# Altium PCB PCB_V1.PcbDoc
Units mm, origin at the board's own origin, x right, y up, seen from the top; angles counter-clockwise.
Board outline 275.45 x 22 mm, 2 copper layers (Top Layer, Bottom Layer), stack 0.08 mm thick; 7 components, 4 nets, 16 pads, 3 vias.
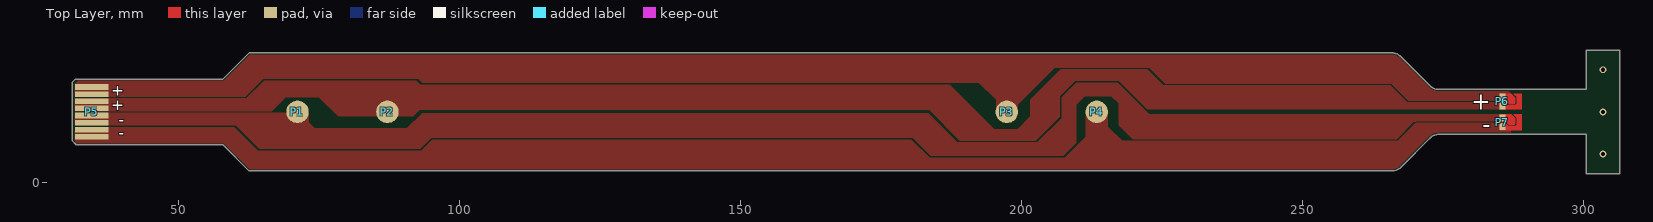
[diagram p0: Top Layer view]
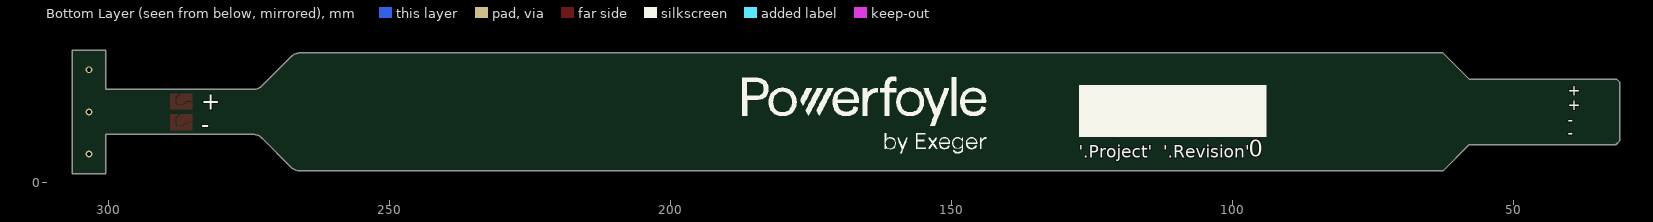
[diagram p1: Bottom Layer view, seen from below]

## Layer stack, top to bottom
Top Solder: solder mask 0.0102, Solder Resist, Dk 3.5
Top Layer: signal copper 0.035
Dielectric 1: dielectric 0.01, Kapton, Dk 4.8
Bottom Layer: signal copper 0.035
Bottom Solder: solder mask 0.0102, Solder Resist, Dk 3.5

## Board outline
31.75,6.65 57.85,6.65 62.5,2 265.894,2 ccw(c265.9,4.232) 267.569,2.75 272.569,7.75 cw(c274.238,6.268) 274.244,8.5 300.45,8.5 300.45,1.5 306.45,1.5 306.45,23.5 300.45,23.5 300.45,16.5 274.219,16.5 cw(c274.213,18.732) 272.544,17.25 267.544,22.25 ccw(c265.875,20.768) 265.869,23 62.5,23 57.85,18.35 31.6,18.35 31,17.75 31,7.4

## Design rules (kind name [scope] priority, off if disabled: settings)
BoardOutlineClearance [All] p1: gap=0.3 ignorepadtopadclearanceinfootprint=FALSE
Clearance "Clearance to cell connections" [HasFootprint('Cell_pad_6mm')] p1: gap=0.6 ignorepadtopadclearanceinfootprint=FALSE
Clearance [All] p2: gap=0.2 ignorepadtopadclearanceinfootprint=FALSE
DiffPairsRouting [All] p1: maxlimit=0.254 minlimit=0.254 mostfreqgap=0.254 substack1={AC398A8C-2EBD-4929-A576-1C4F7B57599D} toplayer_{ac398a8c-2ebd-4929-a576-1c4f7b57599d}_minwidth=0.381 toplayer_{ac398a8c-2ebd-4929-a576-1c4f7b57599d}_maxwidth=0.381 toplayer_{ac398a8c-2ebd-4929-a576-1c4f7b57599d}_prefwidth=0.381 bottomlayer_{ac398a8c-2ebd-4929-a576-1c4f7b57599d}_minwidth=0.381 bottomlayer_{ac398a8c-2ebd-4929-a576-1c4f7b57599d}_maxwidth=0.381 bottomlayer_{ac398a8c-2ebd-4929-a576-1c4f7b57599d}_prefwidth=0.381 substack2={C3FBE846-BD83-49AA-845B-1BEE8A776ADA} toplayer_{c3fbe846-bd83-49aa-845b-1bee8a776ada}_minwidth=0.381 toplayer_{c3fbe846-bd83-49aa-845b-1bee8a776ada}_maxwidth=0.381 toplayer_{c3fbe846-bd83-49aa-845b-1bee8a776ada}_prefwidth=0.381 bottomlayer_{c3fbe846-bd83-49aa-845b-1bee8a776ada}_minwidth=0.381 bottomlayer_{c3fbe846-bd83-49aa-845b-1bee8a776ada}_maxwidth=0.381 bottomlayer_{c3fbe846-bd83-49aa-845b-1bee8a776ada}_prefwidth=0.381 substack3={068A34C2-B61F-40AE-8550-B44704E20CBD} toplayer_{068a34c2-b61f-40ae-8550-b44704e20cbd}_minwidth=0.381 toplayer_{068a34c2-b61f-40ae-8550-b44704e20cbd}_maxwidth=0.381 toplayer_{068a34c2-b61f-40ae-8550-b44704e20cbd}_prefwidth=0.381 bottomlayer_{068a34c2-b61f-40ae-8550-b44704e20cbd}_minwidth=0.381 bottomlayer_{068a34c2-b61f-40ae-8550-b44704e20cbd}_maxwidth=0.381 bottomlayer_{068a34c2-b61f-40ae-8550-b44704e20cbd}_prefwidth=0.381 toplayer_minwidth=0.381 toplayer_maxwidth=0.381 toplayer_prefwidth=0.381 bottomlayer_minwidth=0.381 bottomlayer_maxwidth=0.381 bottomlayer_prefwidth=0.381 substack4={1DBF04A3-A739-4845-80F4-67AE6DF34821} toplayer_{1dbf04a3-a739-4845-80f4-67ae6df34821}_minwidth=0.381 toplayer_{1dbf04a3-a739-4845-80f4-67ae6df34821}_maxwidth=0.381 toplayer_{1dbf04a3-a739-4845-80f4-67ae6df34821}_prefwidth=0.381 bottomlayer_{1dbf04a3-a739-4845-80f4-67ae6df34821}_minwidth=0.381 bottomlayer_{1dbf04a3-a739-4845-80f4-67ae6df34821}_maxwidth=0.381 bottomlayer_{1dbf04a3-a739-4845-80f4-67ae6df34821}_prefwidth=0.381 substack5={706D0DFD-092C-4A59-9570-597311E816E1} toplayer_{706d0dfd-092c-4a59-9570-597311e816e1}_minwidth=0.381 toplayer_{706d0dfd-092c-4a59-9570-597311e816e1}_maxwidth=0.381 toplayer_{706d0dfd-092c-4a59-9570-597311e816e1}_prefwidth=0.381 bottomlayer_{706d0dfd-092c-4a59-9570-597311e816e1}_minwidth=0.381 bottomlayer_{706d0dfd-092c-4a59-9570-597311e816e1}_maxwidth=0.381 bottomlayer_{706d0dfd-092c-4a59-9570-597311e816e1}_prefwidth=0.381 substack6={F6441547-04AD-42D8-8F2E-114EB13474D3} toplayer_{f6441547-04ad-42d8-8f2e-114eb13474d3}_minwidth=0.381 toplayer_{f6441547-04ad-42d8-8f2e-114eb13474d3}_maxwidth=0.381 toplayer_{f6441547-04ad-42d8-8f2e-114eb13474d3}_prefwidth=0.381 bottomlayer_{f6441547-04ad-42d8-8f2e-114eb13474d3}_minwidth=0.381 bottomlayer_{f6441547-04ad-42d8-8f2e-114eb13474d3}_maxwidth=0.381 bottomlayer_{f6441547-04ad-42d8-8f2e-114eb13474d3}_prefwidth=0.381 substack7={D3D7B19F-2A18-4F5B-8A84-D7E783B0B577} toplayer_{d3d7b19f-2a18-4f5b-8a84-d7e783b0b577}_minwidth=0.381 toplayer_{d3d7b19f-2a18-4f5b-8a84-d7e783b0b577}_maxwidth=0.381 toplayer_{d3d7b19f-2a18-4f5b-8a84-d7e783b0b577}_prefwidth=0.381 bottomlayer_{d3d7b19f-2a18-4f5b-8a84-d7e783b0b577}_minwidth=0.381 bottomlayer_{d3d7b19f-2a18-4f5b-8a84-d7e783b0b577}_maxwidth=0.381 bottomlayer_{d3d7b19f-2a18-4f5b-8a84-d7e783b0b577}_prefwidth=0.381 substack8={33F0C8AE-5BAA-4F54-8420-C15B5188DF2B} toplayer_{33f0c8ae-5baa-4f54-8420-c15b5188df2b}_minwidth=0.381 toplayer_{33f0c8ae-5baa-4f54-8420-c15b5188df2b}_maxwidth=0.381 toplayer_{33f0c8ae-5baa-4f54-8420-c15b5188df2b}_prefwidth=0.381 bottomlayer_{33f0c8ae-5baa-4f54-8420-c15b5188df2b}_minwidth=0.381 bottomlayer_{33f0c8ae-5baa-4f54-8420-c15b5188df2b}_maxwidth=0.381 bottomlayer_{33f0c8ae-5baa-4f54-8420-c15b5188df2b}_prefwidth=0.381 substack9={5DEA7FFC-9C65-4E3C-AA6C-196D072506BA} toplayer_{5dea7ffc-9c65-4e3c-aa6c-196d072506ba}_minwidth=0.381 toplayer_{5dea7ffc-9c65-4e3c-aa6c-196d072506ba}_maxwidth=0.381 toplayer_{5dea7ffc-9c65-4e3c-aa6c-196d072506ba}_prefwidth=0.381 bottomlayer_{5dea7ffc-9c65-4e3c-aa6c-196d072506ba}_minwidth=0.381 bottomlayer_{5dea7ffc-9c65-4e3c-aa6c-196d072506ba}_maxwidth=0.381 bottomlayer_{5dea7ffc-9c65-4e3c-aa6c-196d072506ba}_prefwidth=0.381 maxuncoupledlength=12.7
PolygonConnect [All] p1: connectstyle=Direct reliefconductorwidth=0.254 reliefentries=4 polygonreliefangle="90 Angle" airgapwidth=0.254
RoutingVias [All] p1: holewidth=0.711 width=1.27 viastyle="Through Hole" minholewidth=0.711 minwidth=1.27 maxholewidth=0.711 maxwidth=1.27
SolderMaskExpansion [All] p1: expansion=0.102 istentingtop=FALSE
UnRoutedNet [All] p1: checkbadconnections=TRUE
Width [All] p1: maxlimit=10 minlimit=0.2 preferedwidth=2 substack1={AC398A8C-2EBD-4929-A576-1C4F7B57599D} substack2={C3FBE846-BD83-49AA-845B-1BEE8A776ADA} substack3={068A34C2-B61F-40AE-8550-B44704E20CBD} substack4={1DBF04A3-A739-4845-80F4-67AE6DF34821} substack5={706D0DFD-092C-4A59-9570-597311E816E1} substack6={F6441547-04AD-42D8-8F2E-114EB13474D3} substack7={D3D7B19F-2A18-4F5B-8A84-D7E783B0B577} substack8={33F0C8AE-5BAA-4F54-8420-C15B5188DF2B} substack9={5DEA7FFC-9C65-4E3C-AA6C-196D072506BA}
28 further rules are at their usual default settings.

## Components (designator, comment, footprint, x,y, rotation, side; value= is the part's Value field where it differs from the comment)
P1 "Cell connection" Cell_Pad_4mm 71.116,12.5 r0 top
P2 "Cell connection" Cell_Pad_4mm 87.116,12.5 r0 top
P3 "Cell connection" Cell_Pad_4mm 197.347,12.5 r0 top
P4 "Cell connection" Cell_Pad_4mm 213.347,12.5 r0 top
P5 "Exeger IV-test" EXEGER_IV_8_PIN_NO_STIFF 34.5,16.935 r0 top
P6 "Customer conn, solder short" Customer_2022_solder_short 287.05,14.35 r0 top
P7 "Customer conn, solder short" Customer_2022_solder_short 287.05,10.65 r0 top

## Footprints (in the part's own frame and the unit in brackets; to place one, negate y for a bottom-side part, rotate by r counter-clockwise, add the part's x,y. Pads: shape width x height; smd on the part's side, far side on the other; paste and mask are expansions set on the pad)
Cell_Pad_4mm [mm]
  round 4 smd mask+0: 1(0,0)
Customer_2022_solder_short [mm]
  rect 1x1.3 smd paste-2 mask+0: 1(-1.5,0.75) 2(-1.5,-0.75)
  Top Layer region: -2,1.4 0.1,1.4 0.8,0.7 0.8,-0.3 0.6,-0.5 -0.3,-0.5 -0.9,0.1 -2,0.1
  Top Layer region: -2,-1.4 1.9,-1.4 1.9,1.4 0.5,1.4 0.5,1.3 1,0.8 1,-0.4 0.7,-0.7 -0.4,-0.7 -1,-0.1 -2,-0.1
EXEGER_IV_8_PIN_NO_STIFF [mm] "TE  4-487576-9 mating"
  rect 6x1 smd paste-2 mask+0.1: 1(0,0) 2(0,-1.27) 3(0,-2.54) 4(0,-3.81) 5(0,-5.08) 6(0,-6.35) 7(0,-7.62) 8(0,-8.89)

## Part data
P1 P2 P3 P4: library part "Cell connection 1P"
P5: library part "Header 8", "Header, 8-Pin"
P6 P7: library part "Header 2", "Header, 2-Pin"

## Via types
v1: diameter 1.2, hole 0.75, Top Layer to Bottom Layer, 3 vias

## Nets (pads, with @x,y where several pads share a name; then routed paths per layer and width w, separated by ;. In a path a pad name is that pad's centre, name@x,y a point inside that pad or via, vN(x,y) a via of type N, cw(c..) or ccw(c..) an arc to the next point about the centre after c; other vN are vias at no path point)
N_1: P1.1 P5.5 P5.6 P7.1
N_2: P4.1 P5.7 P5.8 P7.2
P_1: P2.1 P5.3 P5.4 P6.2
P_2: P3.1 P5.1 P5.2 P6.1
copper on no net:
  other v1: 303.45,5 303.45,12.5 303.45,20

## Polygon pours and split planes (outlines as drawn)
N_1 on Top Layer "N_1_L01_P005" (solid, pour order 5): 31.513,12.347 69.147,12.347 70.4,13.6 72.01,13.6 73.11,12.5 73.11,10.665 74.225,9.55 90.579,9.55 93.301,12.271 183.328,12.271 188.531,7.068 202.8,7.068 207.086,11.354 207.086,15.114 209.663,17.691 217.051,17.691 222.693,12.05 287.15,12.05 285.85,10.75 269.803,10.75 266.694,7.641 219.719,7.641 217.272,10.088 217.272,14 215.96,15.312 211.198,15.312 209.697,13.811 209.697,6.997 207.37,4.67 183.83,4.67 180.575,7.925 94.928,7.925 92.916,5.912 64.285,5.912 60.112,10.085 31.508,10.085
N_2 on Top Layer "N_2_L01_P004" (solid, pour order 4): 31.531,9.806 59.819,9.806 64.05,5.575 93.15,5.575 95.125,7.55 180.35,7.55 183.6,4.3 207.675,4.3 211.417,8.042 211.417,12.5 212.387,13.47 214.374,13.47 215.344,12.5 215.344,9.881 217.866,7.359 266.909,7.359 270.1,10.55 285.7,10.55 287,9.25 287,8.15 279.925,1.075 37.775,1.075 31.51,7.34 31.51,8.6
P_2 on Top Layer "P_2_L01_P003" (solid, pour order 3): 31.505,15.171 61.802,15.171 65.028,18.397 92.62,18.397 93.301,17.717 192.383,17.717 195.446,14.654 195.446,12.251 196.395,11.302 198.346,11.302 199.282,12.238 199.282,13.74 205.873,20.331 222.724,20.331 225.556,17.498 265.752,17.498 268.8,14.45 285.85,14.45 287.15,15.75 285.6,17.3 272.75,17.3 266.425,23.625 61.95,23.625 57.175,18.85 32.91,18.85 31.51,17.45
P_1 on Top Layer "P_1_L01_P002" (solid, pour order 2): 31.51,14.891 61.991,14.891 65.175,18.075 92.225,18.075 92.975,17.325 187.2,17.325 195.075,9.45 199.3,9.45 201.55,11.7 201.55,14.667 206.958,20.075 222.325,20.075 225.15,17.25 265.6,17.25 268.6,14.25 286.05,14.25 286.65,13.65 285.95,12.95 222.375,12.95 217.272,18.053 209.534,18.053 206.792,15.312 206.792,11.628 202.523,7.359 188.983,7.359 183.5,12.842 92.841,12.842 91.699,11.7 78.325,11.7 74.9,15.125 69,15.125 66.501,12.626 31.508,12.626

## Silkscreen, mask and mechanical layers (free items; w line width, h text height)
Top Overlay:
  text "+" at 40.325,15.35 h2
  text "+" at 283.45,12.85 h3
  text "+" at 40.325,12.8 h2
  text "-" at 40.325,10.125 h2
  text "-" at 283.45,8.75 h3
  text "-" at 40.325,7.8 h2
Bottom Overlay:
  drawing of 21 lines, arcs and shapes, not listed
  text "+" at 40.325,15.35 h2
  text "+" at 283.45,12.85 h3
  text "+" at 40.325,12.8 h2
  text "-" at 40.325,10.125 h2
  text "-" at 283.45,8.75 h3
  text "-" at 40.325,7.8 h2
  text "'.Project'  '.Revision'" at 127.3,4.325 h2.2
  text "0" at 97.05,3.575 h5
Cell drawing:
  circle w0.013: c197.347,12.497 r7
  circle w0.013: c87.116,12.497 r7
  circle w0.013: c71.116,12.497 r7
  circle w0.013: c213.347,12.497 r7
  circle w0.013: c213.349,12.497 r7
  circle w0.013: c213.349,12.497 r8
  circle w0.013: c71.116,12.497 r8
  lines w0.1: -10.575,39.1 142.25,39.1 ; -3.95,44.225 -3.95,-14.1 142.25,-14.1 ; 142.232,12.5 142.25,-14.1 ; 288.45,51.775 288.45,-14.1 ; 289.675,39.1 142.25,39.1 ; 300.45,-14.1 288.45,-14.1 ; 142.25,-14.1 288.45,-14.1 ; 142.25,-14.1 142.25,39.1 ; 87.116,2 87.116,23 197.347,2 197.347,23 87.116,2
  lines w0.2: 300.45,8.5 306.45,1.5 ; 306.45,8.5 300.45,1.5 ; 300.45,1.5 306.45,1.5 ; 300.45,1.5 306.45,23.5 300.45,16.5 306.45,16.5 300.45,23.5 306.45,1.5
Mech notes:
  rectangle: 203.1,7.25 230.1,17.75
Board Outline:
  lines w0.2: 57.85,6.65 62.5,2 215.894,2 265.894,2 ccw(c265.9,4.232) 267.569,2.75 272.569,7.75 cw(c274.238,6.268) 274.244,8.5 296.45,8.5 300.45,8.5 300.45,1.5 306.45,1.5 306.45,23.5 300.45,23.5 300.45,16.5 296.45,16.5 274.219,16.5 cw(c274.213,18.732) 272.544,17.25 267.544,22.25 ccw(c265.875,20.768) 265.869,23 215.869,23 62.5,23 ; 57.85,6.65 57.85,6.65 ; 57.85,6.65 31.75,6.65 31,7.4 31,17.75 31.6,18.35 57.85,18.35 62.5,23 ; 62.5,23 62.5,23